# Altium PCB BaseConnector.PcbDoc
Units mil, origin at the board's own origin, x right, y up, seen from the top; angles counter-clockwise.
Board outline 875.59 x 560 mil, 2 copper layers (Top1, Bottom2), stack 14.611 mil thick; 4 components, 6 nets, 38 pads, 13 vias.
Unrouted connection lines stored in the file: 11.
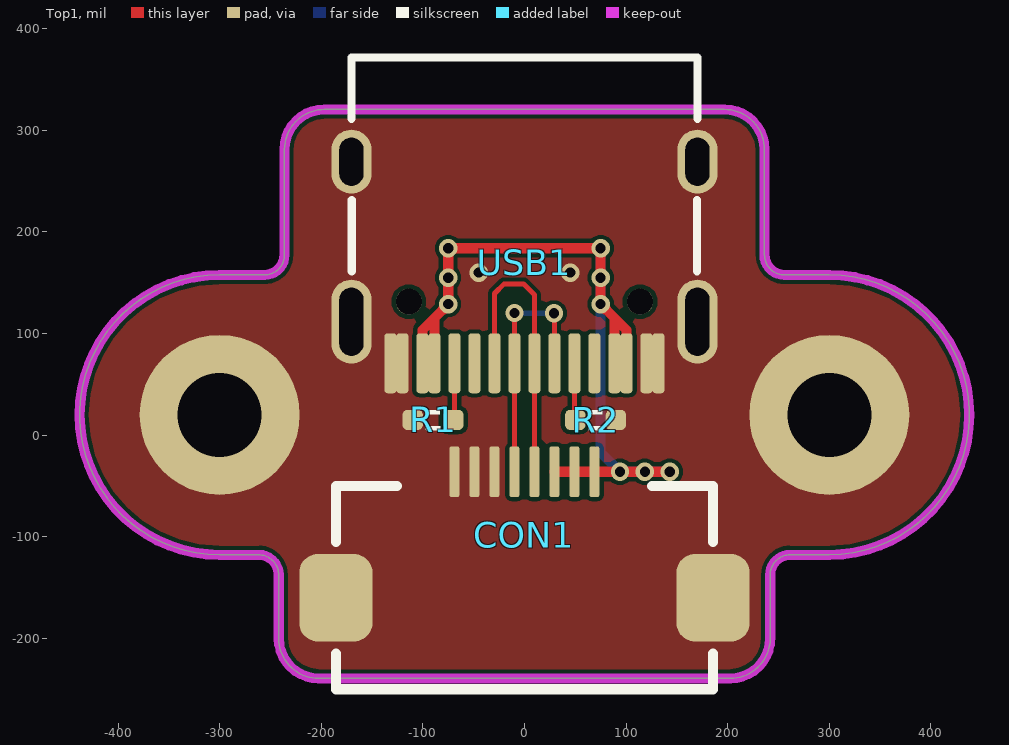
[diagram p0: Top1 view]
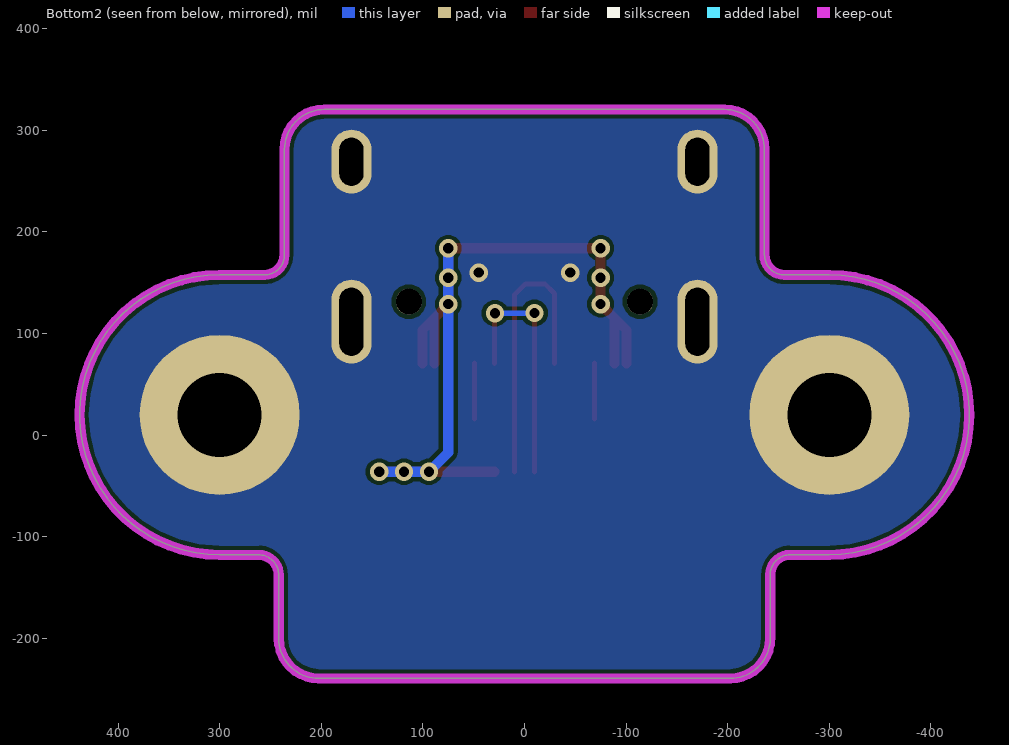
[diagram p1: Bottom2 view, seen from below]
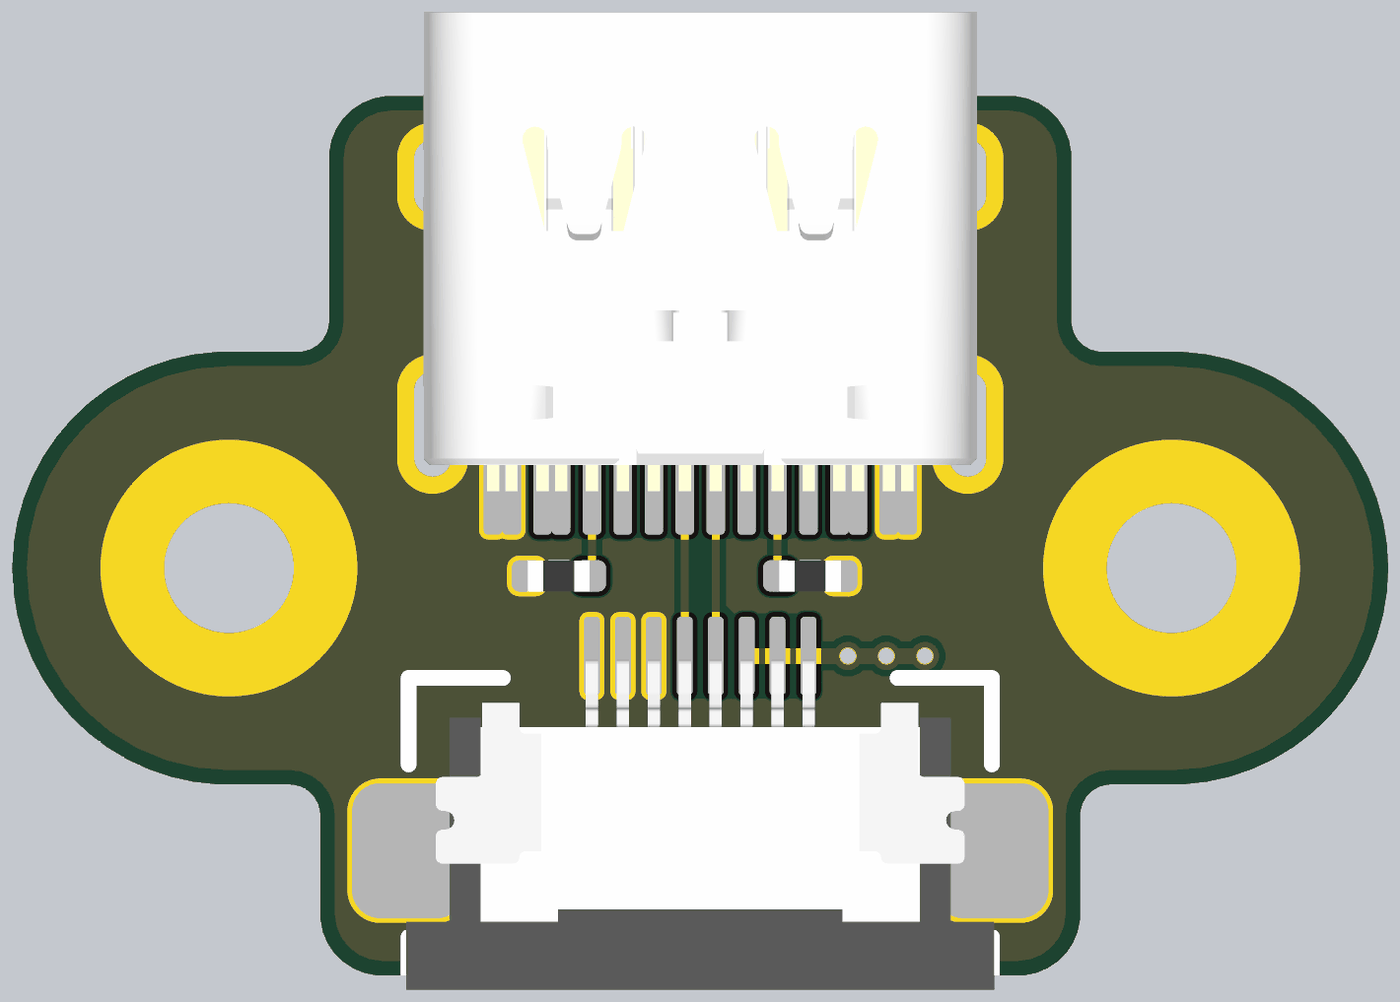
[diagram p2: 3D render of the assembled board from above, using the file's embedded part models]

## Layer stack, top to bottom
Top Solder: solder mask 0.4, Solder Resist, Dk 3.5
Top1: signal copper 1.4
Dielectric 1: prepreg 11.811, PP-006, Dk 4.1
Bottom2: signal copper 1.4
Bottom Solder: solder mask 0.4, Solder Resist, Dk 3.5

## Board outline
-241.85,-200.01 -241.85,-137.48 ccw(c-261.54,-137.48) -261.54,-117.8 -300,-117.8 cw(c-300,20) -300,157.8 -255.91,157.8 ccw(c-255.91,177.48) -236.22,177.48 -236.22,281.25 cw(c-196.85,281.25) -196.85,320.62 196.85,320.62 cw(c196.85,281.25) 236.22,281.25 236.22,177.48 ccw(c255.91,177.48) 255.91,157.8 300,157.8 cw(c300,20) 300,-117.8 261.54,-117.8 ccw(c261.54,-137.48) 241.85,-137.48 241.85,-200.01 cw(c202.48,-200.01) 202.48,-239.38 -202.48,-239.38 cw(c-202.48,-200.01)

## Design rules (kind name [scope] priority, off if disabled: settings)
Clearance Clearance_Logo [InNetClass('Logo')] p1: gap=8 ignorepadtopadclearanceinfootprint=FALSE
Clearance [All] p2: gap=4 ignorepadtopadclearanceinfootprint=FALSE except(0: Arc-Hole Track-Hole SMDPad-Hole THPad-Hole Via-Hole Fill-Hole Poly-Hole Region-Hole Text-Hole)
ComponentClearance [All] p1: gap=0 collisioncheckmode=3 verticalgap=0 showdistances=FALSE
DiffPairsRouting [All] p1: maxlimit=9 minlimit=9 mostfreqgap=9 toplayer_minwidth=15 toplayer_maxwidth=15 toplayer_prefwidth=15 bottomlayer_minwidth=15 bottomlayer_maxwidth=15 bottomlayer_prefwidth=15 maxuncoupledlength=500
FanoutControl Fanout_BGA [All] p1: bgadir=Out bgaviamode=Centered fanoutstyle=Auto fanoutdirection=Alternating viagrid=1 // Fanout_BGA (Default Rule)
HoleSize [All] p1: absolutevalues=TRUE maxlimit=10000 minlimit=8 maxpercent=80.000 minpercent=20.000
MinimumSolderMaskSliver [All] p1 off: minsoldermaskwidth=2
PlaneClearance [All] p1: clearance=8
PlaneConnect [All] p1: planeconnectstyle=Direct reliefexpansion=20 reliefentries=4 reliefconductorwidth=10 reliefairgap=10
PolygonConnect [All] p1: connectstyle=Direct reliefconductorwidth=10 reliefentries=4 polygonreliefangle="90 Angle" airgapwidth=10
RoutingVias [All] p1: holewidth=8 width=16 viastyle="Through Hole" minholewidth=6 minwidth=12 maxholewidth=28 maxwidth=50
SilkToSilkClearance [All] p1: silktosilkclearance=0
SilkToSolderMaskClearance [IsPad] p1: minsilkscreentomaskgap=0 clearancetoexposedcopper=TRUE
SolderMaskExpansion [All] p1: expansion=3 istentingtop=FALSE
Width Logo [InNetClass('Logo')] p1: maxlimit=100 minlimit=0.1 preferedwidth=10
Width GND [(InNet('AGND') OR InNet('GND'))] p2: maxlimit=50 minlimit=4 preferedwidth=10
Width VCC [(InNet('VDD_SYS_3.3V') OR InNet('VDD_AV_3.3V') OR InNet('VDD_5V') OR InNet('VDD1V2-SYS') OR InNet('VDD1V1-EPHY') OR InNet('VDD-CPUX') OR InNet('VDD-CPUS') OR InNet('VDD-CPUFB') OR InNet('VCC-DRAM'))] p3: maxlimit=50 minlimit=4 preferedwidth=10
Width [All] p4: maxlimit=10000 minlimit=4 preferedwidth=4
21 further rules are at their usual default settings.

## Components (designator, comment, footprint, x,y, rotation, side; value= is the part's Value field where it differs from the comment)
CON1 "FFC_0.5_8" FFC_0.5_8 0,-125 r0 top locked
R1 "5.1K" RES_0402 -90,15 r0 top value=22R
R2 "5.1K" RES_0402 70,15 r0 top value=22R
USB1 "Type-C" Type-C-TOP 0,170 r90 top locked

## Footprints (in the part's own frame and the unit in brackets; to place one, negate y for a bottom-side part, rotate by r counter-clockwise, add the part's x,y. Pads: shape width x height; smd on the part's side, far side on the other; paste and mask are expansions set on the pad)
FFC_0.5_8 [mil]
  rrect50% 72x86 smd: 0(-185.63,-35) 0(185.63,-35)
  rrect50% 10x50 smd: 1(-68.9,89) 2(-49.21,89) 3(-29.53,89) 4(-9.84,89) 5(9.84,89) 6(29.53,89) 7(49.21,89) 8(68.9,89)
  silkscreen extent -186,-125 186,75, body extent -187,-124 187,87, height 82
RES_0402 [mil]
  rrect50% 20x20 smd: 1(-20,0) 2(20,0)
  silkscreen extent -6,-10 6,10, body extent -20,-10 20,10, height 14
Type-C-TOP [mm]
  round 0.65 hole 0.65: 0(-0.98,2.89) 0(-0.98,-2.89)
  oval 1.6x1 hole 0.6 slot 1.2 at 0 deg: 1(2.52,4.325) 2(2.52,-4.325)
  oval 2.1x1 hole 0.6 slot 1.7 at 0 deg: 3(-1.48,-4.325) 4(-1.48,4.325)
  rrect50% 1.5x0.3 smd: A1(-2.52,-3.35) A4(-2.52,-2.55) A5(-2.52,-1.25) A6(-2.52,-0.25) A7(-2.52,0.25) A8(-2.52,1.25) A9(-2.52,2.55) A12(-2.52,3.35) B1(-2.52,3.05) B4(-2.52,2.25) B5(-2.52,1.75) B6(-2.52,0.75) B7(-2.52,-0.75) B8(-2.52,-1.75) B9(-2.52,-2.25) B12(-2.52,-3.05)
  silkscreen extent -0.22,-4.33 5.12,4.33, body extent -2.57,-4.48 5.18,4.48, height 3.26

## Part data
CON1: "FFC"
R1 R2: library part 电阻-0402, "Resistor"
USB1: library part USB-Type-C-TOP

## Free pads (board coordinates)
  round 157.48 hole 82.68: ""(-300,20) ""(300,20)

## Via types
v1: diameter 18, hole 10, Top1 to Bottom2, tented both sides, 13 vias

## Nets (pads, with @x,y where several pads share a name; then routed paths per layer and width w, separated by ;. In a path a pad name is that pad's centre, name@x,y a point inside that pad or via, vN(x,y) a via of type N, cw(c..) or ccw(c..) an arc to the next point about the centre after c; other vN are vias at no path point)
GND: CON1.0 CON1.1 CON1.2 CON1.3 pad. R1.1 R2.2 USB1.1 USB1.2 USB1.3 USB1.4 USB1.A1 USB1.A12 USB1.B1 USB1.B12
  other v1: -45,160 45,160
NetR1_2: R1.2 USB1.B5 | length 54.7
  Top1 w5: R1.2@-68.9,16.1 USB1.B5
NetR2_1: R2.1 USB1.A5 | length 55
  Top1 w5: R2.1@49.21,15.79 USB1.A5
USB_DM_1: CON1.4 USB1.A7 USB1.B7 | length 244.3
  Top1 w5: CON1.4 USB1.A7 v1(-9.84,120.16) ; v1(29,120) 29.53,119.47 USB1.B7
  Bottom2 w5: v1@-9.68,120 v1(29,120)
USB_DP_1: CON1.5 USB1.A6 USB1.B6 | length 290.6
  Top1 w5: USB1.B6 -29.53,139.47 -20,149 -1,149 9.84,138.16 USB1.A6 CON1.5
VBUS: CON1.6 CON1.7 CON1.8 USB1.A4 USB1.A9 USB1.B4 USB1.B9 | length 877.1
  Top1 w10: USB1.A9 -100.39,103.61 -88.58,115.42 ; USB1.B4 -88.58,115.42 ; CON1.6 CON1.7 CON1.8 v1(94,-36) v1(118.5,-36) v1(143,-36) ; USB1.B9 88.58,115.42 ; USB1.A4 100.39,103.61 88.58,115.42 ; -88.58,115.42 v1(-75,129) v1(-75,155) v1(-75,184) v1(75,184) v1(75,155) v1(75,129) 88.58,115.42
  Bottom2 w10: v1(75,184) v1(75,155) v1(75,129) 75,-17 v1(94,-36) v1(118.5,-36) v1(143,-36)
pads on no net: USB1.0 USB1.A8 USB1.B8

## Polygon pours and split planes (outlines as drawn)
GND on Top1 "GND_L01_P000" (solid, remove dead copper, pour order 0): -440,320 440,320 440,-240 -440,-240
GND on Bottom2 "GND_L02_P002" (solid, remove dead copper, pour order 2): -440,320 440,320 440,-240 -440,-240

## Keep-outs
Keep-Out Layer:
  the board outline again, w10

## Silkscreen, mask and mechanical layers (free items; w line width, h text height)
Mechanical 1:
  the board outline again, w10